# Altium PCB Pocket_Organ_V19_2021-09-19.pcbdoc (part 3 of 3)
Units mil, origin at the board's own origin, x right, y up, seen from the top; angles counter-clockwise.
Board outline 7303.06 x 4993.89 mil, 2 copper layers (Top Layer, Bottom Layer); 194 components, 271 nets, 792 pads, 208 vias.
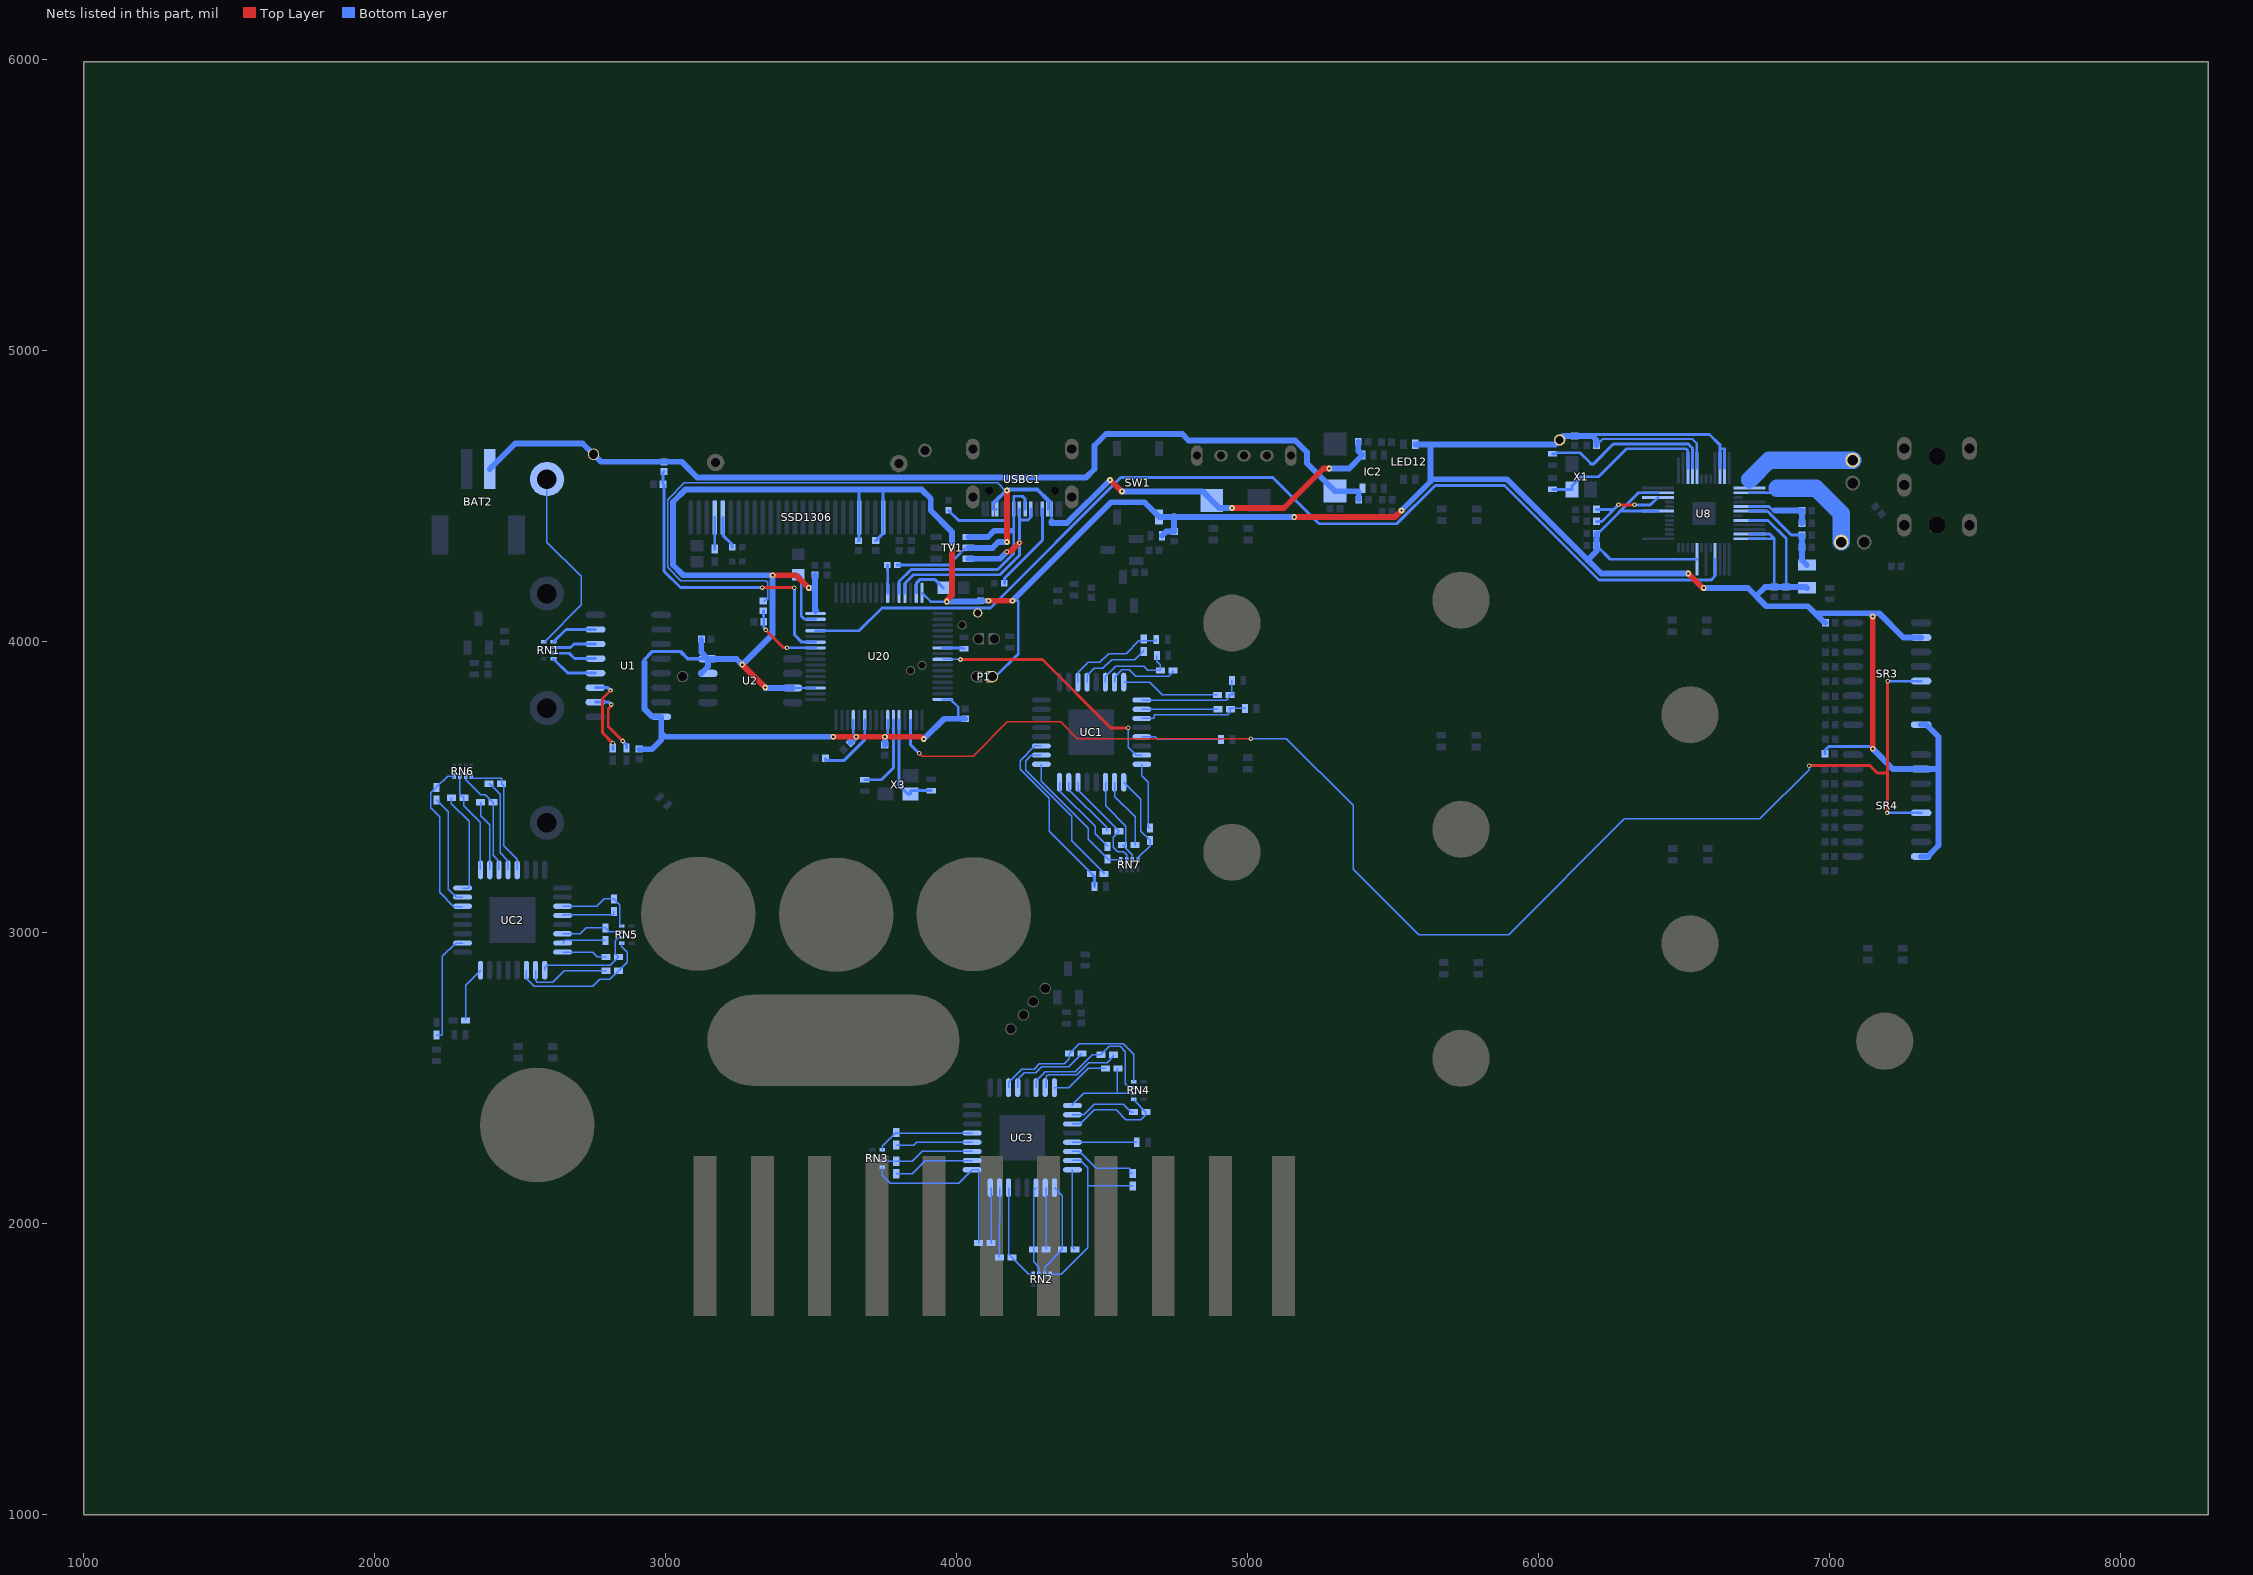
[diagram p3: the nets of this part, all layers, seen from the top]

## Via types
v1: diameter 15.75, hole 7.87, Top Layer to Bottom Layer, 165 vias
v2: diameter 20, hole 7.87, Top Layer to Bottom Layer, 43 vias

## Nets (pads, with @x,y where several pads share a name; then routed paths per layer and width w, separated by ;. In a path a pad name is that pad's centre, name@x,y a point inside that pad or via, vN(x,y) a via of type N, cw(c..) or ccw(c..) an arc to the next point about the centre after c; other vN are vias at no path point) (continued)
SR-OE: SR3.13 SR4.13 U20.3 | length 4948.8
  Top Layer w5: v1@3872.06,3616.27 3881.86,3606.47 4057.17,3606.47 4175.27,3724.57 4358.26,3724.57 4415.59,3667.24 v1(5011.8,3667.24)
  Top Layer w10: v1(6931.09,3574.03) 7140.65,3574.03 7165.34,3549.33 7194.87,3549.33 7200.77,3543.43 7200.77,3482.08 ; v1(7198.8,3411.54) 7200.77,3413.51 v1(7200.77,3864.29)
  Bottom Layer w5: v1@5011.76,3667.27 5134.36,3667.27 5364.17,3437.47 5364.17,3217.73 5588.58,2993.32 5897.63,2993.32 6295.27,3390.96 6761.8,3390.96 6931.09,3560.25 v1(6931.09,3574.03)
  Bottom Layer w10: U20.3@3842.34,3730.88 3842.35,3645.96 v1(3872.04,3616.26) ; v1@7198.76,3411.57 SR4.13@7315.76,3412.17 ; v1(7200.77,3864.29) 7315.22,3864.29 SR3.13@7315.81,3864.89
SSD1306_26: R3.2 SSD1306.26 | length 115.7
  Bottom Layer w10: SSD1306.26@3196.84,4427.28 3196.85,4366.26 3229.01,4334.1 R3.2@3229.01,4324.92
SSD1306_27: C22.2 SSD1306.27 | length 108.7
  Bottom Layer w10: C22.2@3169.26,4318.63 SSD1306.27@3169.33,4427.27
TOUCH_TRIGGER: U20.57 UC1.31 | length 859.5
  Top Layer w10: v1(4013.77,3939.1) 4295.27,3939.07 4530.39,3703.95 v1(4590.54,3703.95)
  Bottom Layer w5: U20.57@3952.57,3939.54 3953.01,3939.1 v1(4013.77,3939.1) ; v1@4590.56,3703.97 4590.56,3637.87 4617.86,3610.57 UC1.31@4637.06,3610.57
TX_MIDI: pad.32 U8.16 U20.29 | length 3627.8
  Bottom Layer w10: U20.29@3515.57,4037.96 3665.16,4037.97 3743.86,4116.27 4117.06,4116.27 4564.96,4564.17 5087.56,4564.17 5246.06,4405.67 5513.76,4405.67 5645.66,4537.47 5883.86,4537.47 6208.66,4212.77 6594.46,4212.77 6607.86,4226.17 U8.16@6607.89,4283.58
U1_2: C84.2 U1.2 | length 236.5
  Top Layer w10: v1(2813.06,3784.41) 2813.06,3778.89 2803.06,3768.89 2803.06,3708.89 v1(2853.06,3658.89)
  Bottom Layer w10: U1.2@2758.95,3792.23 2805.24,3792.23 v1(2813.06,3784.41) ; v1(2853.06,3658.89) 2866.13,3645.82 C84.2@2866.13,3635.55
U1_3: C86.2 U1.3 | length 285.9
  Top Layer w10: v1(2811.01,3832.59) 2783.06,3804.67 2783.06,3687.37 v1(2818.89,3651.49)
  Bottom Layer w10: U1.3@2758.95,3842.23 2801.37,3842.23 v1(2811.01,3832.59) ; C86.2@2818.89,3629.08 v1(2818.89,3651.49)
U1_4: RN1.5 U1.4 | length 163.8
  Bottom Layer w10: RN1.5@2615.25,3940.86 2663.88,3892.23 U1.4@2758.95,3892.23
U1_5: RN1.6 U1.5 | length 151.3
  Bottom Layer w10: RN1.6@2615.3,3960.53 2669.29,3960.54 2687.6,3942.23 U1.5@2758.95,3942.23
U1_6: RN1.7 U1.6 | length 148.7
  Bottom Layer w10: RN1.7@2615.3,3980.21 2673.22,3980.23 2685.22,3992.23 U1.6@2758.95,3992.23
U1_7: RN1.8 U1.7 | length 161.2
  Bottom Layer w10: RN1.8@2615.3,3999.9 2657.57,4042.23 U1.7@2758.95,4042.23
U8_1: C42.1 U8.1 | length 432.8
  Bottom Layer w10: U8.1@6726.37,4528.06 6726.37,4578.86
  Bottom Layer w59.05: 6726.37,4557.19 6793.31,4624.13 C42.1@7080.7,4624.14
U8_2: C41.1 U8.2 | length 449.3
  Bottom Layer w10: U8.2@6726.37,4512.06 6820.87,4512.07
  Bottom Layer w59.05: 6820.86,4527.68 6954.72,4527.68 7041.33,4441.07 C41.1@7041.33,4342.64
U8_5: C44.1 C45.1 U8.5 | length 322.5
  Bottom Layer w10: U8.5@6726.37,4465.06 6792.66,4465.07 6806.86,4450.87 C44.1@6906.56,4450.87
  Bottom Layer w19.68: 6813.38,4450.91 C44.1@6906.53,4450.91 ; C45.1@6906.52,4407.6 C44.1@6906.53,4450.91
U8_6: C58.1 C59.1 L1.2 U8.6 | length 323.8
  Bottom Layer w10: U8.6@6726.37,4449.06 6787.06,4449.07 6869.86,4366.27 C59.1@6906.56,4366.27
  Bottom Layer w19.68: C59.1@6906.52,4366.26 C58.1@6906.52,4324.92 6906.52,4280.61 L1.2@6923.22,4263.9
U8_34: C48.1 C49.1 U8.34 | length 328.3
  Top Layer w10: v1(6275.58,4470.59) v1(6330.69,4470.59)
  Bottom Layer w10: C48.1@6199.76,4413.51 6218.5,4413.5 v1(6275.58,4470.59) 6259.84,4454.84 C49.1@6199.76,4454.84 ; v1(6330.69,4470.59) 6386.04,4470.59 U8.34@6411.52,4496.06
U8_39: C12.2 U8.39 X1.3 | length 592.8
  Bottom Layer w10: C12.2@6049.21,4523.75 6116.14,4523.75 6116.14,4535.55 6147.64,4567.05 6206.69,4567.05 6303.14,4663.5 6507.86,4663.5 6513.77,4657.6 U8.39@6513.89,4596.57
U8_40: C11.2 U8.40 X1.1 | length 603.7
  Bottom Layer w10: C11.2@6049.21,4645.79 6059.06,4645.8 6062.99,4649.73 6143.7,4649.73 6179.13,4614.3 X1.1@6179.14,4610.36 6188.98,4610.36 6257.87,4679.26 6515.78,4679.26 6529.55,4665.48 U8.40@6529.89,4596.57
U20_5: C80.1 U20.5 X3.3 | length 358.1
  Bottom Layer w10: U20.5@3802.97,3730.88 3802.97,3506.2 3832.68,3476.49 X3.3@3842.51,3476.5 ; X3.3@3842.51,3476.5 3842.54,3486.35 3844.44,3488.36 C80.1@3913.34,3488.36
U20_6: C81.2 U20.6 X3.1 | length 279.3
  Bottom Layer w10: C81.2@3685.03,3525.71 3742.11,3525.72 X3.1@3755.89,3539.5 3783.28,3566.9 U20.6@3783.28,3730.88
U20_11: R1.1 U20.11 | length 238.4
  Bottom Layer w10: R1.1@3549.76,3598.89 3549.76,3592.47 3613.96,3592.47 3684.86,3663.37 U20.11@3684.86,3730.88
U20_26: R10.2 R11.2 U20.26 | length 265.6
  Top Layer w10: v1(3344.48,4040.56) 3405.51,3979.54 v1(3417.32,3979.54)
  Bottom Layer w10: R10.2@3336.56,4106.57 R11.2@3337.56,4068.12 ; R11.2@3337.56,4068.12 3337.57,4047.48 v1(3344.48,4040.56) ; v1(3417.32,3979.54) 3514.93,3979.54 U20.26@3515.57,3978.91
U20_31: C2.1 U20.31 | length 199.7
  Bottom Layer w10: C2.1@3456.66,4230.47 3466.56,4220.57 3466.56,4088.67 3477.86,4077.27 U20.31@3515.57,4077.33
U20_42: R9.2 U20.42 | length 96.3
  Bottom Layer w10: R9.2@3762.52,4263.67 3762.48,4245.29 3763.77,4244.01 U20.42@3763.6,4167.88
U20_47: C79.2 U20.47 | length 143.8
  Bottom Layer w10: U20.47@3862.06,4167.87 3862.06,4201.37 3875.36,4214.67 3925.16,4214.67 C79.2@3954.72,4185.16
UC1_1: C4.2 RN7.5 UC1.1 | length 320.6
  Bottom Layer w5: UC1.1@4575.46,3517.07 4633.06,3459.47 4633.06,3348.87 4665.36,3317.07 4665.36,3299.17 4623.96,3257.77 RN7.5@4623.99,3251
UC1_2: C5.1 UC1.2 | length 245
  Bottom Layer w5: UC1.2@4543.96,3517.07 4543.96,3467.77 4613.96,3397.77 C5.1@4613.96,3301.09
UC1_3: C5.2 RN7.6 UC1.3 | length 320.6
  Bottom Layer w5: UC1.3@4512.46,3517.07 4512.46,3436.27 4582.66,3366.07 4582.66,3301.07 C5.2@4571.06,3301.07 ; C5.2@4571.01,3301.07 4604.32,3267.82 RN7.6@4604.31,3251
UC1_6: C6.2 RN7.7 UC1.6 | length 362.6
  Bottom Layer w5: UC1.6@4418.06,3517.07 4418.06,3489.27 4558.85,3348.48 4558.85,3348.34 4539.36,3328.85 4539.36,3293.22 4553.69,3278.89 4573.06,3278.89 4584.64,3267.32 RN7.7@4584.62,3251
UC1_7: C6.1 UC1.7 | length 222.3
  Bottom Layer w5: UC1.7@4386.56,3517.07 4386.56,3491.27 4515.96,3361.97 C6.1@4515.96,3348.37
UC1_8: C8.1 UC1.8 | length 288.3
  Bottom Layer w5: UC1.8@4355.06,3517.07 4355.06,3486.87 4476.36,3365.57 4476.36,3340.27 C8.1@4519.66,3296.97
UC1_9: C8.2 RN7.8 UC1.9 | length 465.4
  Bottom Layer w5: UC1.9@4292.06,3578.67 4292.06,3519.87 4453.06,3358.87 4453.06,3320.67 4519.66,3254.07 4522.72,3250.99 RN7.8@4564.94,3251
UC1_10: C9.2 UC1.10 | length 563
  Bottom Layer w5: UC1.10@4292.06,3610.37 4256.76,3610.37 4238.16,3591.77 4238.16,3558.27 4395.66,3400.77 4395.66,3316.17 4507.66,3204.17 C9.2@4507.67,3201.98
UC1_11: C9.1 R15.1 UC1.11 | length 633.5
  Bottom Layer w5: UC1.11@4292.06,3641.87 4268.56,3641.87 4218.46,3591.77 4218.46,3562.17 4318.86,3461.87 4318.86,3347.87 C9.1@4464.76,3201.98
  Bottom Layer w10: C9.1@4464.76,3201.98 4474.4,3192.34 R15.1@4474.4,3158.67
UC1_19: C18.1 R19.2 UC1.19 | length 351.8
  Bottom Layer w5: UC1.19@4417.66,3861.09 4417.66,3893.49 4453.06,3928.89 4493.06,3928.89 4523.06,3958.89 4583.06,3958.89 4627.28,4003.1 C18.1@4643.69,4003.1 ; C18.1@4643.66,4003.07 4686.96,4003.07 R19.2@4687,4007.79
UC1_20: C18.2 UC1.20 | length 286.2
  Bottom Layer w5: UC1.20@4449.17,3890.24 4449.17,3861.09 4449.16,3884.99 4473.06,3908.89 4503.06,3908.89 4533.06,3938.89 4613.06,3938.89 4643.69,3969.51 C18.2@4643.69,3973.1
UC1_22: C15.1 R20.2 UC1.22 | length 284.4
  Bottom Layer w5: UC1.22@4512.06,3861.07 4512.06,3880.07 4547.26,3915.27 4643.66,3915.27 4657.46,3901.47 C15.1@4701.01,3901.47 ; R20.2@4688.97,3952.67 4688.96,3932.97 4700.97,3920.96 C15.1@4701.01,3901.47
UC1_23: C15.2 UC1.23 | length 248.6
  Bottom Layer w5: UC1.23@4543.56,3861.07 4543.56,3878.17 4568.86,3903.47 4594.46,3903.47 4616.16,3881.77 4730.26,3881.77 4743.86,3895.37 C15.2@4743.92,3901.47
UC1_24: C14.2 UC1.24 | length 340
  Bottom Layer w5: UC1.24@4575.06,3861.07 4663.76,3861.07 4707.36,3817.47 C14.2@4897.01,3817.47
UC1_25: C14.1 R21.2 UC1.25 | length 387.1
  Bottom Layer w5: UC1.25@4637.06,3799.47 4927.16,3799.17 4939.86,3811.87 C14.1@4939.92,3817.47 ; C14.1@4933.46,3817.47 4954.06,3817.47 4946.84,3824.69 R21.2@4946.85,3867.33
UC1_26: C13.2 UC1.26 | length 262
  Bottom Layer w5: UC1.26@4637.06,3767.97 4637.35,3768.26 C13.2@4898.91,3768.27
UC1_27: C13.1 R22.2 UC1.27 | length 388.9
  Bottom Layer w5: UC1.27@4637.06,3736.47 4679.16,3736.47 4679.16,3749.27 4932.46,3749.27 4941.86,3758.67 C13.1@4941.86,3768.27 ; C13.1@4935.39,3768.26 4938.01,3770.88 R22.2@4992.13,3770.88
UC1_29: R8.1 UC1.29 | length 276.1
  Bottom Layer w5: UC1.29@4637.06,3673.57 4682.66,3673.57 4691.65,3664.58 R8.1@4909.44,3664.58
UC1_32: C4.1 UC1.32 | length 234.3
  Bottom Layer w5: UC1.32@4637.06,3579.07 4637.06,3539.97 4659.46,3517.57 4659.46,3359.97 C4.1@4665.36,3359.97
UC2_2: C27.1 UC2.2 | length 379
  Bottom Layer w5: C27.1@2212.56,2647.71 2231.92,2647.75 2233.06,2648.89 2233.06,2918.89 2278.2,2964.03 UC2.2@2302.4,2964.03
UC2_6: C26.2 RN6.5 UC2.6 | length 566.6
  Bottom Layer w5: RN6.5@2273.64,3538.24 2251.08,3538.2 C26.2@2212.56,3499.73 2193.06,3480.19 2193.06,3428.89 2223.06,3398.89 2223.06,3138.89 2272.03,3089.93 UC2.6@2302.4,3089.93 ; RN6.5@2273.66,3529.47 RN6.5@2273.66,3538.17
UC2_7: C26.1 UC2.7 | length 385.4
  Bottom Layer w5: C26.1@2212.56,3456.81 2253.06,3416.33 2253.06,3148.89 2280.53,3121.43 UC2.7@2302.4,3121.43
UC2_8: C25.1 UC2.8 | length 358.4
  Bottom Layer w5: C25.1@2264.01,3463.77 2263.97,3443.91 2324.77,3383.12 2324.77,3152.97 UC2.8@2302.37,3152.97
UC2_9: C25.2 RN6.6 UC2.9 | length 351.5
  Bottom Layer w5: RN6.6@2293.32,3538.24 2293.31,3477.38 C25.2@2306.92,3463.77 2306.89,3436.43 2363.96,3379.36 UC2.9@2363.96,3215.97
UC2_10: C24.1 UC2.10 | length 245
  Bottom Layer w5: C24.1@2364.36,3448.04 2364.36,3402.61 2395.46,3371.51 UC2.10@2395.46,3215.97
UC2_11: C24.2 RN6.7 UC2.11 | length 379.7
  Bottom Layer w5: RN6.7@2313.01,3538.24 2312.96,3524.84 2364.17,3473.64 2379.92,3473.64 2405.51,3448.04 2407.28,3448.04 2407.47,3447.86 2407.47,3265.67 2426.97,3246.17 UC2.11@2426.97,3215.97
UC2_12: C23.1 UC2.12 | length 323.6
  Bottom Layer w5: C23.1@2393.91,3511.77 2395.66,3511.77 2431.06,3476.27 2431.06,3275.47 2458.46,3248.07 UC2.12@2458.46,3215.97
UC2_13: C23.2 RN6.8 UC2.13 | length 448.3
  Bottom Layer w5: RN6.8@2332.69,3538.24 2332.68,3531.41 2436.8,3531.41 C23.2@2436.8,3511.72 ; C23.2@2436.76,3511.67 2443.06,3505.47 2443.06,3298.87 2489.86,3252.07 UC2.13@2489.86,3215.97
UC2_19: C19.1 RN5.1 UC2.19 | length 291
  Bottom Layer w5: UC2.19@2646.4,3090.33 2763.06,3090.33 2788.6,3115.86 2822.83,3115.86 2843.06,3095.62 2843.06,3029.1 RN5.1@2849.31,3022.85
UC2_20: C19.2 UC2.20 | length 189.3
  Bottom Layer w5: UC2.20@2646.36,3058.87 2648.56,3060.97 2822.86,3060.97 C19.2@2822.86,3072.97
UC2_22: C20.1 RN5.2 UC2.22 | length 217.1
  Bottom Layer w5: UC2.22@2646.36,2995.97 2707.36,2995.97 2728.16,3016.77 C20.1@2793.26,3016.77 ; C20.1@2793.31,3016.75 2806.9,3003.16 RN5.2@2849.31,3003.16
UC2_23: C20.2 UC2.23 | length 150.8
  Bottom Layer w5: UC2.23@2646.41,2964.43 2655.81,2973.83 C20.2@2793.31,2973.83
UC2_24: C21.2 UC2.24 | length 155.8
  Bottom Layer w5: UC2.24@2646.4,2932.93 2749.03,2932.93 2765.41,2916.55 C21.2@2795.46,2916.55
UC2_25: C21.1 RN5.3 UC2.25 | length 365.5
  Bottom Layer w5: UC2.25@2584.77,2870.97 2584.87,2880.87 2593.06,2888.87 2810.7,2888.87 2838.38,2916.55 2826.77,2928.16 2826.77,2971.67 2838.59,2983.48 RN5.3@2849.31,2983.48
UC2_26: C47.2 UC2.26 | length 296.2
  Bottom Layer w5: UC2.26@2553.1,2870.97 2553.11,2835.88 2559.05,2829.93 2612.2,2829.93 2651.57,2869.3 C47.2@2795.47,2869.3
UC2_27: C47.1 RN5.4 UC2.27 | length 492
  Bottom Layer w5: UC2.27@2521.61,2870.97 2521.6,2843.76 2549.21,2816.16 2750,2816.16 2773.62,2839.78 2808.86,2839.78 C47.1@2838.39,2869.3 2868.11,2899.03 2868.11,2932.3 2849.31,2951.09 RN5.4@2849.31,2963.79
UC2_32: C28.1 UC2.32 | length 194
  Bottom Layer w5: C28.1@2312.82,2698.27 2312.79,2819.31 UC2.32@2364.41,2870.93
UC3_1: C78.2 RN2.6 UC3.1 | length 334.3
  Bottom Layer w5: RN2.6@4302.91,1825.7 4302.9,1849.88 4364.35,1911.33 4364.35,2096.32 UC3.1@4337.27,2123.4
UC3_2: C66.1 UC3.2 | length 212.9
  Bottom Layer w5: UC3.2@4305.77,2123.4 4307.91,2121.26 C66.1@4307.92,1911.37
UC3_3: C66.2 RN2.7 UC3.3 | length 309
  Bottom Layer w5: C66.2@4265.01,1911.37 4264.96,1868.77 4283.26,1850.57 RN2.7@4283.26,1825.77 ; C66.2@4265.01,1911.37 4264.99,2114.12 UC3.3@4274.27,2123.4
UC3_6: C70.2 RN2.8 UC3.6 | length 341
  Bottom Layer w5: UC3.6@4179.87,2123.4 4179.87,1894.64 C70.2@4190.72,1883.77 4248.79,1825.72 RN2.8@4263.54,1825.7
UC3_7: C70.1 UC3.7 | length 239.6
  Bottom Layer w5: C70.1@4147.86,1883.77 UC3.7@4148.36,2123.37
UC3_8: C71.2 UC3.8 | length 191.2
  Bottom Layer w5: UC3.8@4116.87,2123.4 4118.93,2121.33 C71.2@4118.92,1933.07
UC3_9: C71.1 RN3.5 UC3.9 | length 641.3
  Bottom Layer w5: RN3.5@3744.96,2194.27 3744.96,2166.37 3772.46,2138.87 4007.76,2138.87 4053.86,2184.97 4075.96,2184.97 C71.1@4076.01,1933.07
UC3_10: C72.2 UC3.10 | length 303.8
  Bottom Layer w5: C72.2@3793.26,2171.41 3847.94,2171.37 3893.06,2216.5 4053.87,2216.5 UC3.10@4029.36,2216.5
UC3_11: C72.1 RN3.6 UC3.11 | length 323
  Bottom Layer w5: RN3.6@3744.94,2213.94 3792.94,2213.94 C72.1@3793.26,2214.33 3848.46,2214.29 3882.17,2248 UC3.11@4053.87,2248
UC3_12: C73.2 UC3.12 | length 264.6
  Bottom Layer w5: C73.2@3793.26,2269.81 3853.96,2269.79 3863.67,2279.5 UC3.12@4053.87,2279.5
UC3_13: C73.1 RN3.8 UC3.13 | length 342
  Bottom Layer w5: RN3.8@3744.94,2253.31 3744.94,2266.52 3791.13,2312.71 C73.1@3793.26,2312.73 3795.11,2310.9 UC3.13@4053.87,2310.9
UC3_19: C76.1 RN4.5 UC3.19 | length 624.6
  Bottom Layer w5: UC3.19@4179.47,2467.4 4179.47,2486.48 4224.4,2531.41 4267.71,2531.41 4285.42,2549.13 4370.07,2549.13 4387.98,2567.04 C76.1@4388.01,2584.57 4422.31,2618.89 4573.06,2618.89 4609.54,2582.41 RN4.5@4609.53,2487.2
UC3_20: C76.2 UC3.20 | length 285.7
  Bottom Layer w5: UC3.20@4210.97,2467.4 4210.97,2496.8 4233.06,2518.89 4273.06,2518.89 4293.06,2538.89 4385.23,2538.89 C76.2@4430.92,2584.57
UC3_22: C75.1 RN4.6 UC3.22 | length 531.1
  Bottom Layer w5: UC3.22@4273.86,2467.37 4273.86,2490.87 4304.76,2521.77 4407.66,2521.77 4466.56,2580.67 C75.1@4496.26,2580.67 ; C75.1@4496.25,2580.62 4524.51,2608.89 4563.06,2608.89 4580.7,2591.26 4580.7,2481.26 4593.06,2468.89 4608.12,2468.89 RN4.6@4609.53,2467.51
UC3_23: C75.2 UC3.23 | length 304.7
  Bottom Layer w5: UC3.23@4305.36,2467.37 4309.06,2471.07 4309.06,2505.87 4314.96,2511.77 4413.36,2511.77 4454.66,2553.07 4517.66,2553.07 4539.16,2574.57 C75.2@4539.16,2580.67
UC3_24: C65.2 UC3.24 | length 202.5
  Bottom Layer w5: UC3.24@4336.86,2467.37 4386.56,2467.37 4452.57,2533.38 C65.2@4512.01,2533.37
UC3_25: C65.1 RN4.7 UC3.25 | length 316.2
  Bottom Layer w5: UC3.25@4398.87,2405.8 4398.87,2408.84 4437.81,2447.78 RN4.7@4609.53,2447.83 ; 4553.06,2447.78 4553.06,2531.53 C65.1@4554.92,2533.37
UC3_26: C74.1 UC3.26 | length 236.1
  Bottom Layer w5: UC3.26@4398.86,2374.11 4437.87,2374.11 4474.4,2410.64 4572.83,2410.64 4600.38,2383.09 C74.1@4608.46,2383.09
UC3_27: C74.2 RN4.8 UC3.27 | length 364.2
  Bottom Layer w5: UC3.27@4398.86,2342.61 4426.06,2342.57 4474.36,2390.97 4549.16,2390.97 4582.66,2357.47 4633.86,2357.47 4651.36,2374.97 C74.2@4651.38,2383.09 4612.16,2422.27 4612.16,2425.47 RN4.8@4609.56,2428.17
UC3_29: R18.1 UC3.29 | length 221.6
  Bottom Layer w5: UC3.29@4398.86,2279.87 4460.82,2279.87 4460.82,2279.45 R18.1@4620.06,2279.44
UC3_30: C77.1 UC3.30 | length 249.4
  Bottom Layer w5: UC3.30@4398.86,2248.37 4422.11,2248.37 4480.31,2190.17 4596.45,2190.17 4596.45,2172.26 C77.1@4606.29,2172.26
UC3_31: C77.2 RN2.5 UC3.31 | length 658.5
  Bottom Layer w5: RN2.5@4322.57,1825.77 4359.87,1825.77 4450.76,1916.57 4450.76,2129.34 ; UC3.31@4398.87,2216.9 4425.06,2216.9 4450.76,2191.19 4450.76,2129.34 ; C77.2@4606.29,2129.34 4450.76,2129.34
UC3_32: C78.1 UC3.32 | length 277.5
  Bottom Layer w5: UC3.32@4398.87,2185.4 4398.87,1919.73 C78.1@4407.27,1911.33
USB-DM: TV1.4 U20.44 USBC1.A7 USBC1.B7 | length 906
  Bottom Layer w10: U20.44@3802.97,4167.88 3802.96,4206.67 3844.46,4248.17 4141.76,4248.17 4196.86,4303.27 USBC1.B7@4196.86,4455.87 ; USBC1.B7@4196.84,4455.86 4196.84,4500.12 4226.37,4500.12 4236.21,4490.28 USBC1.A7@4236.21,4455.86
  Bottom Layer w19.68: TV1.4@4041.3,4360.16 4108.14,4360.15 4129.96,4381.97 4190.96,4381.97
USB-DP: TV1.6 U20.45 USBC1.A6 USBC1.B6 | length 894.1
  Top Layer w19.68: v1@4173.26,4309.17 4185.06,4309.17 v1@4216.56,4340.67
  Bottom Layer w10: U20.45@3822.66,4167.87 3822.66,4200.77 3852.36,4230.47 4149.66,4230.47 4216.56,4297.37 USBC1.A6@4216.56,4455.87 ; 4216.56,4418.74 4246.06,4418.74 4255.9,4428.59 USBC1.B6@4255.9,4455.86
  Bottom Layer w19.68: TV1.6@4041.3,4285.36 4149.4,4285.35 v1(4173.22,4309.17)
  other v1: 4216.53,4340.67
USB-VCC: C33.1 D1.1 IC2.4 R9.1 R10.1 TV1.5 USBC1.A4 USBC1.A9 USBC1.B4 USBC1.B9 | length 4407.4
  Top Layer w20: v2(4173.22,4342.64) v2(4173.22,4519.8) ; v2(4527.55,4556.31) 4566.92,4516.94 v2(4568.89,4516.94) ; v2(4946.84,4459.85) 5125.97,4459.85 5261.8,4595.68 v2(5281.49,4595.68)
  Bottom Layer w5: R10.1@3336.61,4139.94 3338.7,4139.94 3350.56,4151.81 ; 3350.56,4142.97 3350.56,4203.77 3344.46,4209.87 3053.16,4209.87 3007.36,4255.67 3007.36,4488.87 3065.06,4546.57 4141.16,4546.57 4168.06,4519.77 v2@4173.26,4519.77
  Bottom Layer w7.87: USBC1.A4@4125.98,4455.9 USBC1.B9@4137.79,4455.9 ; 4314.73,4490.49 4326.77,4478.45 USBC1.A9@4326.76,4455.86 4326.77,4413.51 ; USBC1.A4@4125.96,4455.87 4125.96,4470.77 4174.96,4519.77 4277.56,4519.77 4314.96,4482.37 4314.96,4455.87 4314.76,4490.47 4279.56,4525.67 4173.26,4525.67 4125.96,4478.47 USBC1.A4@4125.96,4455.87
  Bottom Layer w10: R9.1@3796.6,4263.67 3972.43,4263.69 4031.49,4322.75 TV1.5@4041.34,4322.75
  Bottom Layer w20: TV1.5@4041.3,4322.76 4123.75,4322.75 4143.66,4342.67 v2@4173.26,4342.67 ; 4326.76,4413.51 4326.76,4408.67 4379.91,4408.67 v2(4527.55,4556.31) ; v2(4568.89,4516.94) 4846.16,4516.94 D1.1@4877.66,4485.44 4903.25,4459.85 v2(4946.84,4459.85) ; v2(5281.49,4595.68) 5350.02,4595.68 IC2.4@5396.06,4641.73 5380.93,4656.85 C33.1@5380.93,4687.13
USBC1_A5: R5.1 USBC1.A5 | length 251.5
  Bottom Layer w10: R5.1@3972.46,4451.63 4006.56,4417.47 4167.36,4417.47 4177.16,4427.27 USBC1.A5@4177.16,4455.86
USBC1_B5: R7.2 USBC1.B5 | length 309.1
  Bottom Layer w10: R7.2@4164.7,4200.87 4164.66,4218.57 4295.26,4349.17 USBC1.B5@4295.27,4455.86
USR: R6.1 U20.55 | length 74.1
  Bottom Layer w10: U20.55@3952.57,3978.91 4022.97,3978.91 R6.1@4025.58,3976.28
VBAT: BAT2.1 C32.1 D4.1 IC2.3 pad.13 R23.1 | length 3312.7
  Bottom Layer w20: BAT2.1@2395.66,4593.61 2483.83,4681.77 2714.8,4681.77 pad.13@2752.31,4644.26 2778.09,4618.48 R23.1@2994.8,4618.48 ; R23.1@2994.8,4618.48 3055.95,4618.47 3110.23,4564.18 4444.88,4564.18 4474.36,4593.67 4474.36,4674.37 4513.76,4713.77 4775.86,4713.77 4797.86,4691.77 5164.76,4691.77 5204.76,4651.77 5204.76,4613.87 D4.1@5301.17,4517.51 ; D4.1@5301.17,4517.51 5379.94,4517.51 5382.89,4514.56 C32.1@5382.9,4488.27
VBAT_MEAS: R23.2 R35.2 U20.27 | length 1061.6
  Top Layer w10: v1(3332.67,4186.23) 3441.83,4186.23 v1(3442.9,4185.16)
  Bottom Layer w10: R23.2@2994.8,4585.07 2991.49,4581.78 R35.2@2991.5,4541.77 2994.8,4538.48 2994.8,4242.61 3051.18,4186.23 v1(3332.67,4186.23) ; v1(3442.9,4185.16) 3442.9,4023.75 3468.07,3998.58 U20.27@3515.57,3998.59
VBUS: C35.2 C38.1 C39.2 C40.2 C43.2 C46.2 C50.2 C52.2 C53.2 C54.2 C55.2 C56.2 C57.2 C60.1 C61.2 C62.1 C64.2 C83.2 L1.1 LED12.1 P1.1 pad.39 R48.2 SR3.10 SR3.16 SR4.10 SR4.16 SSD1306.6 SSD1306.9 SW1.1 U1.16 U2.3 U2.7 U2.8 U8.8 U8.11 U8.12 U8.20 U8.31 U8.35 U8.41 U8.46 U8.47 U20.7 U20.13 U20.19 U20.32 U20.48 U20.64 | length 14985.7
  Top Layer w20: v2(3263.77,3921.38) v2(3342.51,3842.64) ; v2(3368.1,4228.47) 3448.81,4228.47 v2(3492.12,4185.16) ; v2(3576.76,3673.35) v2(3655.5,3673.35) v2(3753.93,3673.35) 3879.92,3673.35 v2(3887.79,3665.48) ; v2(3966.53,4137.92) 3966.54,4141.86 3984.24,4159.56 v2(3984.24,4326.68) ; v2(4110.23,4140.96) v2(4192.91,4140.96) ; v2(5161.41,4428.36) 5506.96,4428.36 v2(5529.51,4450.91) ; v2(6515.73,4234.37) 6564.95,4185.16 v2(6568.89,4185.16) ; v2(7149.59,3632.01) v2(7149.59,4086.73)
  Bottom Layer w7.87: U2.3@3436.99,3841.05 U20.19@3515.54,3841.05 ; U20.32@3515.57,4097.02 3515.57,4104.38 3517.66,4106.47 ; U20.13@3645.49,3730.88 3645.49,3683.36 v2(3655.5,3673.35) ; v2(3753.93,3673.35) 3763.6,3683.02 U20.7@3763.6,3730.88 ; U20.48@3881.71,4167.88 3911.66,4137.92 v2(3966.53,4137.92) ; U20.64@3952.56,3801.77 3979.86,3801.77 4005.96,3775.67 4005.96,3735.37 ; C56.2@6199.76,4675.32 6221.41,4696.97 6529.56,4696.97 6544.87,4681.57 U8.41@6544.89,4596.57
  Bottom Layer w10: C39.2@3663.38,4347.32 3665.36,4347.27 SSD1306.9@3665.39,4427.27 ; SSD1306.9@3665.35,4420.48 3665.45,4522.88 ; C38.1@3722.44,4347.53 3748.02,4373.12 SSD1306.6@3748.02,4427.28 ; SSD1306.6@3748.06,4427.27 3748.03,4522.85 ; P1.1@4123.46,3880.07 4134.26,3880.07 4212.57,3958.37 4212.57,4140.96 v2(4192.91,4140.96) ; C57.2@6125.97,4707.76 6130.96,4712.67 6588.56,4712.67 6623.96,4677.27 U8.46@6623.89,4596.57 ; C54.2@6199.76,4330.83 6247.01,4283.59 U8.20@6544.89,4283.58 ; C55.2@6199.76,4372.17 6204.72,4372.17 6344.62,4512.07 U8.35@6411.52,4512.06 ; 6281.71,4449.16 U8.31@6411.52,4449.06 ; 6623.86,4663.47 6639.87,4663.37 U8.47@6639.89,4596.57 ; U8.12@6726.37,4354.06 6810.96,4354.47 ; U8.11@6726.37,4370.06 6795.27,4370.2 6811.01,4354.45 C53.2@6811.01,4188.08 ; U8.8@6726.37,4417.06 6789.73,4417.07 6852.35,4354.46 C52.2@6852.35,4188.08 ; C62.1@6985.26,3614.3 6985.26,3627.17 6998.06,3639.87 7141.76,3639.87 v2(7149.59,3632.01)
  Bottom Layer w11.81: 2927.16,3929.27 2927.16,3938.87 2954.76,3966.47 3051.36,3966.47 3076.76,3941.07 U2.8@3145.66,3941.05
  Bottom Layer w20: C83.2@2909.47,3630.77 2953.66,3630.77 2985.12,3662.23 U1.16@2985.12,3742.23 ; 2927.17,3929.27 2927.17,3769.8 2954.74,3742.23 U1.16@2985.12,3742.23 ; U2.7@3122.03,3891.26 3145.65,3914.88 U2.8@3145.65,3941.05 ; C61.2@3123.06,4007.99 3123.06,3963.65 U2.8@3145.65,3941.05 ; v2(3342.51,3842.64) 3344.11,3841.05 U2.3@3436.99,3841.05 ; v2(3368.1,4228.47) 3060.96,4228.47 3025.56,4263.87 3025.56,4480.47 3067.96,4522.87 3880.76,4522.87 3911.36,4492.27 3911.36,4450.77 3984.26,4377.87 v2@3984.26,4326.67 ; v2(3368.1,4228.47) 3368.11,4025.71 v2(3263.77,3921.38) 3244.09,3941.07 U2.8@3145.66,3941.05 ; v2(3492.12,4185.16) 3513.77,4185.16 C35.2@3513.77,4229.48 3513.76,4106.47 3517.66,4106.47 ; v2(3576.76,3673.35) 2997.86,3673.37 2985.12,3686.11 U1.16@2985.12,3742.23 ; C64.2@3635.82,3653.66 v2(3655.5,3673.35) ; C43.2@3753.93,3644.77 v2(3753.93,3673.35) ; v2(3887.79,3665.48) 3957.68,3735.37 C46.2@4029.56,3735.37 ; v2(3966.53,4137.92) 4079.69,4137.92 C40.2@4082.67,4140.9 4110.17,4140.9 v2(4110.23,4140.96) ; v2(4192.91,4140.96) 4531.43,4479.54 4646.04,4479.54 SW1.1@4696.85,4428.73 5144.3,4428.73 5144.67,4428.36 v2(5161.41,4428.36) ; C50.2@4706.68,4364.3 4721.43,4379.02 R48.2@4748.02,4379.02 4748.02,4432.27 ; v2(5529.51,4450.91) 5629.65,4551.04 5629.65,4678.19 ; LED12.1@5577.08,4678.19 6057.99,4678.19 pad.39@6073.43,4693.63 6087.56,4707.77 C57.2@6125.97,4707.76 6184.22,4707.77 6199.76,4692.23 C56.2@6199.76,4675.32 ; 5629.66,4558.87 5892.06,4558.87 6216.56,4234.37 v2@6515.76,4234.37 ; 6169.6,4281.34 6199.76,4311.51 C54.2@6199.76,4330.83 C55.2@6199.76,4372.17 ; v2(6568.89,4185.16) 6720.46,4185.17 6783.46,4122.17 6927.16,4122.17 6984.26,4065.07 C60.1@6987.26,4065.07 ; 6748.65,4156.99 6779.74,4188.08 C53.2@6811.01,4188.08 6852.35,4188.08 6920.3,4188.08 L1.1@6923.22,4185.16 ; 6951.29,4098.05 7171.75,4098.05 7254.91,4014.89 SR3.10@7315.81,4014.89 ; 7144.91,4098.05 7144.91,4091.42 v2(7149.59,4086.73) ; v2(7149.59,3632.01) 7219.47,3562.13 SR4.10@7315.81,3562.13 7375.98,3562.14 ; SR4.16@7315.81,3262.13 7338.78,3262.14 7375.98,3299.33 7375.98,3673.35 7334.44,3714.89 SR3.16@7315.81,3714.89
VOL_1: RN1.1 VOL.1 | length 663.2
  Bottom Layer w5: RN1.1@2581.63,3999.9 2584.08,3999.91 2710.66,4126.49 2710.66,4224.57 2592.47,4342.67 VOL.1@2592.46,4559.17
pads on no net: AUDIO2. BAT2.4 BAT2.5 IC2.5 LED3.3 RN3.2 RN3.7 SR3.9 SSD1306.7 SSD1306.20 SW1.2 SW1.4 SW2.1 TV1.1 TV1.3 U1.8 U1.9 U1.10 U1.11 U8.3 U8.7 U8.24 U8.26 U8.27 U8.28 U8.29 U8.30 U8.32 U8.33 U8.42 U20.1 U20.8 U20.9 U20.10 U20.25 U20.30 U20.33 U20.37 U20.38 U20.39 U20.40 U20.41 U20.43 U20.46 U20.49 U20.50 U20.52 U20.53 U20.54 U20.56 UC1.12 UC1.13 UC1.28 UC1.30 UC2.28 UC2.30 UC2.31 UC3.28 USBC1. USBC1.A8 USBC1.B8

## Polygon pours and split planes (outlines as drawn)
GND on Bottom Layer (solid): 4344.48,3810.25 4344.48,3568.12 4586.61,3568.12 4586.61,3810.25
GND on Bottom Layer (solid): 2354.33,3164.58 2352.36,2920.49 2594.49,2922.45 2596.46,3164.58
GNDA on Top Layer (solid): 6667.32,4746.18 6667.32,4431.22 6795.26,4431.22 6866.13,4358.39 6866.13,4230.44 6986.21,4232.4 6986.21,4171.38 7395.66,4175.32 7690.94,4175.32 7690.94,4746.18
GND on Top Layer (solid): 7803.06,2918.89 7283.06,2918.89 7283.06,2878.89 7103.06,2878.89 7093.06,2918.89 6994.09,2922.45 6994.09,3965.76 6836.61,4103.55 6344.48,4103.55 6068.89,4418.52 5624.8,4421.77 5604.8,4441.77 5584.8,4441.77 5498.03,4379.15 4814.8,4381.77 4631.88,4261.03 4414.8,3981.78 4413.06,4838.89 7803.06,4828.89
SHIELD on Top Layer (solid): 4257.87,3591.74 4671.25,3591.74 4671.25,3119.3 4494.09,3119.3 4454.72,3158.67 4454.72,3237.41 4316.92,3375.21 4316.92,3493.32 4277.55,3532.69 4257.87,3532.69
SHIELD on Top Layer (solid): 4927.16,3729.54 4631.88,3729.54 4631.88,3827.96 4572.83,3887.02 4513.77,3887.02 4395.66,3887.02 4395.66,3946.07 4474.4,4024.81 4690.94,4024.81 4690.94,3926.39 4789.36,3827.96 4927.16,3827.96
GND on Top Layer (solid): 3674.8,3341.78 3634.8,3381.78 2983.06,3378.89 2761.8,3375.21 2761.47,3375.01 2764.8,3551.78 2844.8,3631.78 2844.8,4141.77 2864.8,4161.77 2864.8,4471.77 2914.8,4521.77 2914.8,4751.77 2974.8,4811.77 2984.8,4811.77 4424.8,4821.77 4424.8,3761.78 4503.06,3688.89 4503.06,3618.89 4413.06,3618.89 4342.52,3688.2 4253.06,3688.89 4203.06,3628.89 4203.06,3418.89 3953.06,3418.89 3874.8,3341.78 3674.8,3341.78
SHIELD on Top Layer (solid): 4651.57,4320.09 4474.4,4083.87 4474.4,3158.67 5281.49,2351.59 6108.26,2351.59 6285.43,2528.75 7269.68,2528.75 7446.84,2705.92 7446.84,2863.4 6856.29,3453.95 6836.61,4064.18 6147.63,4064.18 5950.78,4339.77 5419.28,4339.77 5379.91,4320.09

## Keep-outs
Keep-Out Layer:
  circle w7.87 net S$148723: c4468.49,4256.03 r43.31
  circle w7.87 net S$148723: c2503.06,3898.89 r43.31
  circle w7.87 net S$148723: c4724.79,3551.77 r43.31
  circle w7.87 net S$148723: c4246.05,3456.61 r43.31
  circle w5 net S$155472: c2860.22,1957.88 r47.24
  circle w5 net S$155472: c5411.41,1957.89 r47.24
  lines w10: 2671.25,4382.02 ccw(c2789.36,4382.02) 2907.47,4382.02 ccw(c2789.36,4382.02) 2671.25,4382.02 ; 2886.69,2471.78 cw(c3004.8,2471.78) 3122.91,2471.78 cw(c3004.8,2471.78) 2886.69,2471.78 ; 3234.96,3348.9 cw(c3353.07,3348.9) 3471.18,3348.9 cw(c3353.07,3348.9) 3234.96,3348.9 ; 4934.96,2408.9 cw(c5053.07,2408.9) 5171.18,2408.9 cw(c5053.07,2408.9) 4934.96,2408.9 ; 5144.96,4166.95 ccw(c5263.07,4166.95) 5381.18,4166.95 ccw(c5263.07,4166.95) 5144.96,4166.95 ; 6696.69,2221.78 cw(c6814.8,2221.78) 6932.91,2221.78 cw(c6814.8,2221.78) 6696.69,2221.78

## Silkscreen, mask and mechanical layers (free items; w line width, h text height)
Top Overlay:
  rectangle: 5513.06,4578.89 5593.06,4658.89
  circle w7.87: c6518.65,2962.74 r314.96
  circle w7.87: c6518.6,3750.12 r314.96
  circle w7.87: c5731.24,4143.84 r314.96
  circle w7.87: c5731.24,3356.43 r314.96
  circle w7.87: c4943.8,4065.08 r314.96
  circle w7.87: c4943.8,3277.68 r314.96
  circle w7.87: c5731.24,2569.03 r314.96
  circle w7.87: c7193.96,2619.2 r314.96
  circle w7.87: c4057.98,3061.14 r236.22
  circle w7.87: c3585.54,3061.14 r236.22
  circle w7.87: c2563.8,2338.89 r314.96
  circle w7.87: c3113.1,3061.14 r236.22
  circle w19.68: c4623.06,4546.94 r50
  lines w7.87 net S$155590: 3312.99,2390.96 cw(c3312.99,2627.18) 3312.99,2863.4 3454.72,2863.4
  lines w7.87 net S$155592: 3714.56,2863.4 3866.41,2863.39 ; 3864.17,2390.96 ccw(c3864.17,2627.18) 3864.17,2863.4
  lines w7.87 net S$155594: 3312.99,2390.96 3864.17,2390.96
  lines w7.99: 3726.37,4594.61 3726.37,4685.16
  lines w7.99 net S$2850: 3057.08,4342.65 3057.08,3917.45 3915.34,3917.45 3915.34,4342.65 3061.01,4342.65
  lines w7.99 net S$2853: 3249.99,4594.61 3249.99,4685.16 ; 2954.71,3830.83 2954.71,4594.61 4013.77,4594.61 4013.77,3830.83 2954.71,3830.83
  lines w10: 1833.06,2638.89 2153.06,2638.89 2153.06,4558.89 1833.06,4558.89 1833.06,2638.89 ; 2723.06,4594.4 4013.06,4594.4 4013.06,4738.89 2723.06,4738.89 2723.06,4594.4 ; 4013.06,4438.89 4443.06,4438.89 4443.06,4708.89 4013.06,4708.89 4013.06,4438.89 ; 4053.06,4508.89 4403.06,4508.89 4403.06,4738.89 4053.06,4738.89 4053.06,4508.89 ; 4783.06,4578.89 5193.06,4578.89 5193.06,4698.89 4783.06,4698.89 4783.06,4578.89 ; 4813.06,4548.89 5163.06,4548.89 5163.06,4728.89 4813.06,4728.89 4813.06,4548.89 ; 5986.69,3941.78 ccw(c6104.8,3941.78) 6222.91,3941.78 ccw(c6104.8,3941.78) 5986.69,3941.78 ; 6983.06,4298.89 7173.06,4298.89 7173.06,4388.89 6983.06,4388.89 6983.06,4298.89 ; 7033.06,4488.89 7133.06,4488.89 7133.06,4688.89 7033.06,4688.89 7033.06,4488.89 ; 7223.06,4288.89 7513.06,4288.89 7513.06,4678.89 7223.06,4678.89 7223.06,4288.89 ; 7283.06,4728.89 7463.06,4728.89 7463.06,4828.89 7283.06,4828.89 7283.06,4728.89
  lines w19.68 net S$154711: 4887.78,4728.26 4885.82,4730.23 4885.82,4921.17 5078.73,4921.17 5080.7,4919.2 5080.7,4730.23
  text "/CAPO" at 2310.61,4081.1 h45 r4
  text "SCL" at 3805.11,3930.32 h31.5
  text "SDA" at 3746.05,3851.58 h31.5
  text "Chromatic / Percu/Pipe" at 5576.76,3844.83 h45
  text "Piano/Reed" at 4750.78,3785.79 h45 r2
  text "/TUNE" at 2306.68,3685.44 h45 r4
  text "Organ/ / Synth lead" at 6404.32,3451.14 h45 r2
  text "/LOCK" at 2312.59,3301.58 h45 r4
  text "Bass/ / Syth effects" at 5636.61,3057.44 h45 r2
  text "Guitar/ / Synth pad" at 4805.9,2986.58 h45 r2
  text "Strings I/ / Ethnic" at 6384.64,2663.74 h45 r2
  text "C" at 5661.41,2552.38 h196.85 r180
  text "Strings II/ / Percussive" at 6974.4,2329.09 h45
  text "Bass/ / Sound FX" at 5616.92,2270.04 h45 r2
  text "The strumming comb" at 3633.06,2217.57 h78.74
  text "Melody" at 2364.67,2115.51 h78.74 r355
Bottom Overlay:
  circle w10: c3353.06,3348.89 r157.48
  circle w10: c2789.36,4382.01 r157.48
  circle w10: c3004.79,2471.77 r157.48
  circle w10: c6104.79,3941.77 r157.48
  circle w10: c6814.79,2221.77 r157.48
  circle w10: c5053.06,2408.89 r157.48
  circle w10: c5263.06,4166.94 r157.48
  lines w7.87 net S$146126: 6622.04,4657.6 6641.73,4657.6
  lines w7.87 net S$148393: 6622.04,4657.6 6622.04,4671.77 6641.72,4671.77 6641.72,4657.6
  lines w7.87 net S$148395: 6655.5,4657.6 6655.5,4671.38
  lines w7.87 net S$148397: 6608.26,4657.6 6608.26,4671.38
  lines w7.87 net S$148399: 6545.26,4655.63 6545.26,4671.38
  lines w7.87 net S$148401: 6529.52,4655.63 6529.52,4671.38
  lines w7.87 net S$148403: 6515.74,4655.63 6515.74,4671.38
  lines w7.87 net S$148405: 6498.02,4655.63 6498.02,4671.38
  lines w7.87 net S$148407: 6482.27,4655.63 6482.27,4671.38
  lines w7.87 net S$148409: 6336.6,4527.68 6348.41,4527.68
  lines w7.87 net S$148411: 6336.6,4511.93 6348.41,4511.93
  lines w7.87 net S$148413: 6336.6,4494.21 6348.41,4494.21
  lines w7.87 net S$148415: 6336.6,4448.94 6348.41,4448.94
  lines w7.87 net S$148417: 6336.6,4354.45 6348.41,4354.45
  lines w7.87 net S$148421: 6576.76,4212.72 6576.76,4224.53
  lines w7.87 net S$148423: 6545.26,4212.72 6545.26,4224.53
  lines w7.87 net S$148425: 6624,4211.77 6624,4224.53 6654.8,4224.53 6654.8,4211.77 6624,4211.77
  lines w7.87 net S$148427: 6789.36,4354.45 6789.36,4370.2 6805.11,4370.2 6805.11,4354.45 6789.36,4354.45
  lines w7.87 net S$148429: 6789.36,4383.98 6789.36,4401.69 6805.11,4401.69 6805.11,4383.98 6791.33,4383.98
  lines w7.87 net S$148431: 6789.36,4417.44 6805.11,4417.44
  lines w7.87 net S$148433: 6789.36,4448.94 6805.11,4448.94
  lines w7.87 net S$148435: 6789.36,4466.65 6805.11,4466.65
  lines w7.87 net S$148437: 6789.36,4480.44 6807.08,4480.44
  lines w7.87 net S$148441: 6789.36,4527.68 6805.11,4527.68
  lines w7.87 net S$148445: 6789.36,4511.93 6805.11,4511.93
  lines w7.87 net S$148447: 6608.26,4212.72 6608.26,4224.53
  lines w10: 2673.06,4858.97 4562.82,4858.97 4562.82,5488.89 2673.06,5488.89 2673.06,4858.97
  lines w19.68: 2443.64,2801.76 ccw(c2624.26,2901.05) 2526.7,2719.49 ; 3460.43,3546.34 ccw(c3343.07,3646.94) 3462.49,3745.08 ; 3959.36,2565.29 cw(c3879.51,2375.27) 4060.13,2474.56 ; 4083.06,3796.94 cw(c3961.37,3616.71) 4136.12,3487.27 ; 4083.8,3798 cw(c3927.5,3571.02) 4188.24,3481.75 ; 4708.47,3475.4 ccw(c4889.08,3574.69) 4791.52,3393.13
  lines w19.68 net S$155222: 3443.06,3756.94 3507.46,3751.04 3469.86,3735.54 ; 4083.06,3796.94 4153.06,3796.94 4109.93,3775.52
  lines w19.68 net S$155224: 3443.03,3756.93 3457.46,3711.01 3468.25,3737.04 ; 4083.06,3796.94 4093.06,3736.94 4108.28,3777.05
  lines w19.68 net S$155276: 2423.06,2786.94 2433.06,2826.94 2473.06,2796.94 2423.06,2786.94 ; 4030.7,2479.38 4070.7,2449.38 4080.7,2489.38 4030.7,2479.38 ; 4687.89,3460.58 4697.89,3500.58 4737.89,3470.58 4687.89,3460.58
  lines w19.68 net S$155279: 6863.06,3186.94 ccw(c7023.06,3186.95) 7183.06,3186.97 ; 6873.06,3186.94 ccw(c7028.06,3186.95) 7183.06,3186.97 ; 6887.79,3186.23 ccw(c7035.43,3187.82) 7183.06,3186.97 ; 6903.06,3186.94 ccw(c7043.06,3186.94) 7183.06,3186.94
  lines w19.68 net S$155283: 6443.06,4176.94 ccw(c6395.03,4292.45) 6516.92,4264.26 ; 7182.67,3175.68 7153.06,3166.94 7183.06,3196.94
  lines w19.68 net S$155285: 7182.48,3173.24 7213.06,3166.94 7183.06,3196.94
  lines w19.68 net S$155331: 6516.92,4264.26 6525.58,4223.63
  lines w19.68 net S$155333: 6484.24,4239.38 6516.92,4264.26
  lines w19.68 net S$155625: 6863.06,3186.94 6903.06,3186.94
  text "VBUS" at 6043.3,4660.64 h31.5
  text "5V" at 3993.06,4619.2 h39.37
  text "VBAT" at 2783.06,4613.14 h31.5
  text "3.7V Li-Po. PH2.0 connector / 100mA max charge current." at 2096.69,4538.89 h47.24 r90
  text "Warning: check polarity  / before replacing battery" at 1918.42,4531.77 h47.24 r90
  text "BOOT0" at 4700.78,4438.2 h59.05 r270
  text "+  -" at 2410.32,4249.4 h39.37 r352
  text "MIDI synth: / SAM2695" at 6413.06,4186.94 h80
  text "Key backlight / shift registers" at 6882.51,4038.59 h80 r90
  text "16 MB SPI / flash memory /      (for loops)" at 3443.76,3586.95 h80 r1
  text "Touch / sensor" at 5163.38,3335.21 h80
  text "STM32F405 / microcontroller / runnig Micropython." at 4375.97,3295.84 h80
  text "SPI bus:" at 4313.41,2817.26 h39.37 r1
  text "Clock" at 4279.52,2768.91 h39.37
  text "Touch / sensor" at 2923.06,2766.94 h80
  text "MISO" at 4238.18,2723.64 h39.37
  text "Welcome / inside!" at 5487.59,2696.09 h157.48 r1
  text "MOSI" at 4202.75,2676.39 h39.37
  text "Cable select" at 4163.06,2627.26 h39.37
  text "Touch / sensor" at 3942.9,2488.75 h80
  text "Pocket organ / Thomas TEMPE / 2021-05-23" at 5291.32,2033.38 h78.74
  text "V19" at 3646.99,1843.19 h275.59 r10
  text "https://github.com/ttempe/Pocket_Organ" at 5275.58,1684.96 h74.8